# Altium PCB ArduinoUno.PcbDoc (part 2 of 2)
Units mil, origin at the board's own origin, x right, y up, seen from the top; angles counter-clockwise.
Board outline 2698.21 x 2098.43 mil, 2 copper layers (Top Layer, Bottom Layer); 60 components, 50 nets, 220 pads, 30 vias.
Unrouted connection lines stored in the file: 2.
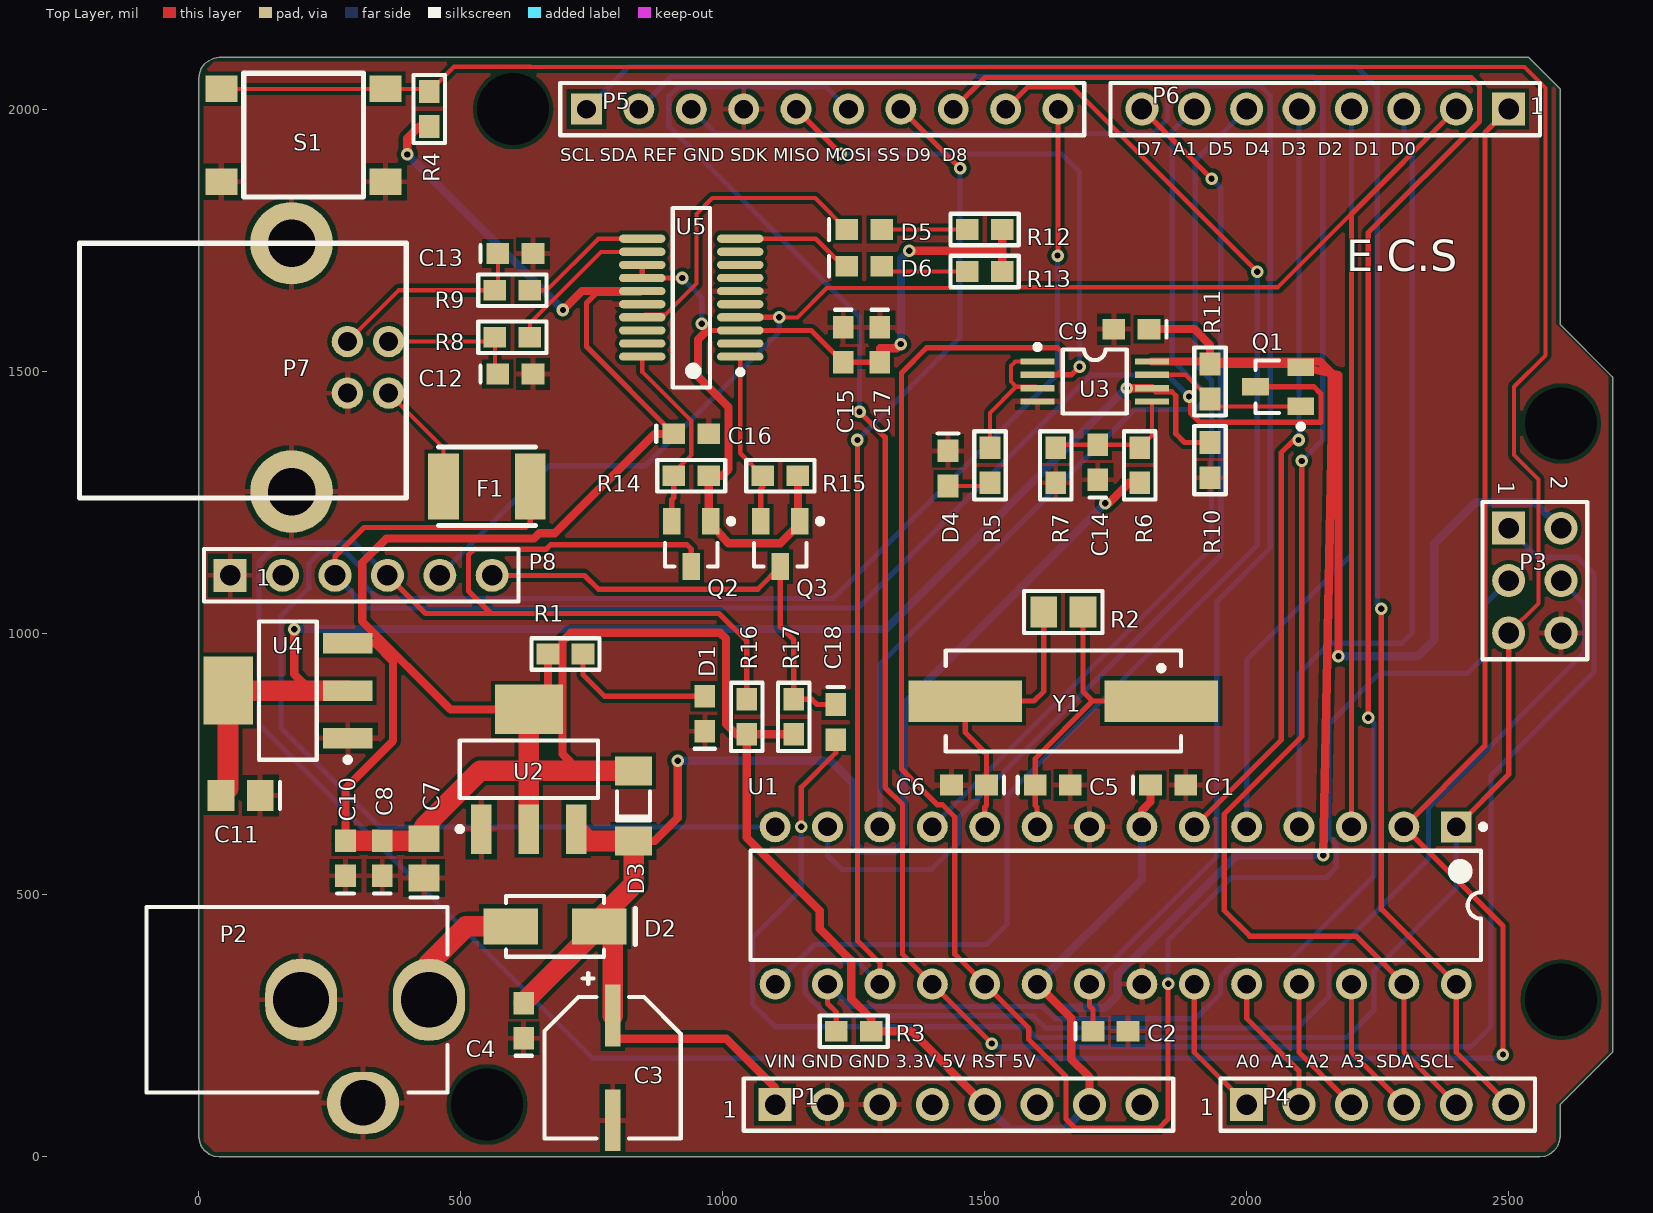
[diagram p0: Top Layer view]

## Part data (continued)
U5: "USB to Full-Handshake UART Interface Chip, UHCI/OHCI/EHCI Compatible, USB 2.0 Compatible, -40 to +85 degC, 20-Pin SSOP, Pb-Free, Tape and Reel", Case/Package=SSOP, Manufacturer=FTDI, Max Operating Temperature=85°C, Max Supply Voltage=5.5V, Min Operating Temperature=-40°C, Min Supply Voltage=2.97V, Operating Supply Current=8mA, Operating Supply Voltage=5V, Package Quantity=2000, Supplier Part Number 1=768-1129-6-ND, Code_JEDEC=MO-137-AD, ComponentLink1Description="Manufacturer URL", ComponentLink1URL=http://www.ftdichip.com/, ComponentLink2Description=Datasheet, ComponentLink2URL=http://www.ftdichip.com/Support/Documents/DataSheets/ICs/DS_FT231X.pdf, ComponentLink3Description="FT231X Product Page", ComponentLink3URL=www.ftdichip.com/Products/ICs/FT231X.html, ComponentLink4Description=http://uk.rs-online.com/webdocs/1102/0900766b811020d3.pdf, ComponentLink4URL=http://uk.rs-online.com/webdocs/1102/0900766b811020d3.pdf, ComponentLink5Description=https://media.digikey.com/pdf/Data%20Sheets/FTDI%20Chip%20PDFs/X-Chip_Series_Errata.pdf, ComponentLink5URL=https://media.digikey.com/pdf/Data%20Sheets/FTDI%20Chip%20PDFs/X-Chip_Series_Errata.pdf, ComponentLink6Description=http://www.alliedelec.com/images/products/datasheets/bm/FTDI/70403932.pdf, ComponentLink6URL=http://www.alliedelec.com/images/products/datasheets/bm/FTDI/70403932.pdf, Data Rate=12Mbps, DatasheetVersion="ver 1.2, Feb-2013", Height=0.059inch, Interface=UART,USB, Length=8.74mm, Manufacturer Part Number=FT231XS-R, Mount="Surface Mount", Number of Channels=1, Number of Pins=20, PackageDescription="20-Pin Small Outline Package, 8.6 x 3.9 mm Body, 0.635 mm Pitch", PackageReference=SSOP-20, PackageVersion=Feb-13, Packaging="Tape and Reel", PartNumber=FT231XS-R, Pricing 1="1=2.12, 25=2.05, 100=1.98, 250=1.78, 500=1.60002 (USD)", Radiation Hardening=No, Stock 1=8392, Supplier 1=Digi-Key, Weight=0.016oz, Width=0.157inch
Y1: library part XTAL, "Crystal Oscillator", ESR (Equivalent Series Resistance)=50R, Frequency Stability=50ppm, Frequency Tolerance=30ppm, Load Capacitance=20pF, Manufacturer Part Number=ECS-160-20-3X-TR, Max Operating Temperature=70°C, Min Operating Temperature=-10°C, Package Quantity=1, Supplier Part Number 1=XC1776DKR-ND, Frequency=16MHz, Height=0.091inch, Lead Free="Lead Free", Length=0.276inch, Mount="Surface Mount", Packaging="Tape and Reel", Pricing 1="1=0.38, 10=0.316, 50=0.2846, 100=0.253, 500=0.24036, 1000=0.2024 (USD)", Stock 1=30831, Supplier 1=Digi-Key, Termination=SMD/SMT, Tolerance=30ppm, Width=0.161inch

## Free pads (board coordinates)
  round 129.92 hole 137.79: 3(550,100) 4(2600,300) 5(2600,1400) 6(600,2000)

## Via types
v1: diameter 24, hole 12, Top Layer to Bottom Layer, 30 vias

## Nets (pads, with @x,y where several pads share a name; then routed paths per layer and width w, separated by ;. In a path a pad name is that pad's centre, name@x,y a point inside that pad or via, vN(x,y) a via of type N, cw(c..) or ccw(c..) an arc to the next point about the centre after c; other vN are vias at no path point)
+3.3VD: P1.4
+3V3D: C11.2 R10.1 U3.6 U4.2 | length 2658.4
  Top Layer w10: U3.6 1826.06,1460.39 1857.07,1460.39 1864.61,1452.85 1864.61,1380.45 1881.59,1363.46 R10.1
  Top Layer w15.75: v1(182.04,1007.42) 182.04,922 214.04,890 U4.2@284.17,890 ; v1(1771.04,1467.2) U3.6
  Top Layer w39.37: C11.2 55.83,703.23 55.83,890 U4.2@284.17,890
  Bottom Layer w15.75: v1(182.04,1007.42) 1311.25,1007.42 v1(1771.04,1467.2)
+3V3E: C15.2 C17.2 Q2.1 Q3.1 R12.2 R13.2 R14.1 R15.2 U5.3 U5.13 U5.14 | length 1824.2
  Top Layer w10: U5.13 U5.14 v1(922.5,1677.5) ; v1(960,1590) 972.5,1577.5 U5.3 1169.03,1577.5 C15.2 C17.2
  Top Layer w15.75: 972.5,1577.5 970.12,1577.5 953.04,1560.42 953.04,1489.42 1011.04,1431.42 1011.04,1312.42 998.62,1300 R14.1 Q2.1@973.46,1213.31 ; Q2.1 Q2.1@973.46,1213.31 ; R15.2 Q3.1@1143.46,1213.31 ; Q3.1 Q3.1@1143.46,1213.31 ; C17.2 1300,1543.42 1332.04,1543.42 v1(1340.04,1551.42) ; v1(1356.04,1729.42) 1524.46,1729.42 1533.46,1720.42 ; R13.2 1533.46,1720.42 ; R12.2 1533.46,1720.42 ; Q2.1@973.46,1213.31 975.19,1211.35 1010.46,1171.42 1110.04,1171.42 1143.46,1204.84 Q3.1@1143.46,1213.31
  Bottom Layer w10: v1(922.5,1677.5) 960,1640 v1(960,1590)
  Bottom Layer w15.75: v1(1340.04,1551.42) 1340.04,1713.42 v1(1356.04,1729.42)
+5VD: C1.1 C7.2 C8.2 C9.1 C10.2 C16.1 D3.1 P1.5 P1.7 P3.2 Q1.2 R1.1 R3.1 R4.1 R11.2 R16.1 R17.2 U1.7 U1.20 U2.2 U3.8 U4.3 U5.15 | length 10273.8
  Top Layer w10: U5.15 842.24,1648.25 758.25,1648.25 740,1630 740,1546.53 C16.1
  Top Layer w15.75: C10.2 280,703.38 370.79,794.16 370.79,945.67 335.91,980.55 U4.3 ; v1(398.04,1913.42) 398.04,1944.42 420.16,1966.53 R4.1 ; R1.1 666.53,890.71 630,854.17 480.28,854.17 312.04,1022.42 312.04,1134.42 358.02,1180.39 640.02,1180.39 650.04,1190.42 680.04,1190.42 869.62,1380 C16.1 ; v1(695.04,1616.42) 731.12,1652.5 U5.15 ; D3.1 726.04,736.93 694.04,768.93 694.04,984.42 710.04,1000.42 995.04,1000.42 1006.04,989.42 1006.04,826.54 1026.04,806.54 R16.1 ; R17.2 R16.1 ; P1.5 1360,240 R3.1 1283.46,264.42 1245.28,302.6 1245.28,375.42 1185.04,435.65 1185.04,470.42 1045.74,609.72 R16.1 ; U1.20 1665.04,264.96 1665.04,187.38 1700,152.42 P1.7 ; U1.7 1800,661.42 1816.53,677.95 C1.1 ; C9.1 1900,1580 1930,1550 R11.2 ; U3.8 R11.2@1925.08,1518.39 ; v1(2146.04,575.79) 2162.52,1382.24 2162.52,1495.02 ; v1(2175.04,955.42) 2175.04,1492.4 2162.52,1495.02 ; R11.2@1925.08,1518.39 2139.5,1518.39 2162.52,1495.36 2162.52,1495.02 ; R11.2@1925.08,1518.39 R11.2 ; R11.2 2097.24,1513.46 Q1.2 2162.52,1495.02
  Top Layer w39.37: C10.2 C8.2 426.06,603.46 C7.2 430,630 536.93,736.93 630,736.93 ; U2.2@630,625.83 630,730 636.93,736.93 ; U2.2@630,854.17 630,736.93 ; D3.1 636.93,736.93 ; 630,736.93 636.93,736.93
  Bottom Layer w15.75: v1(398.04,1913.42) v1(695.04,1616.42) ; P1.5 1547.58,52.42 1652.42,52.42 P1.7 ; U1.7 1800,530 U1.20 1645.28,284.72 1729.28,284.72 1754.04,309.49 1754.04,349.42 1980.41,575.79 v1(2146.04,575.79) ; v1(2175.04,955.42) 2326.04,955.42 2358.04,987.42 2358.04,1170.42 2437.04,1249.42 2550.58,1249.42 P3.2
+VIN: C3.1 C4.2 D2.2 D3.2 P1.1 R6.1 U2.3 | length 2796.6
  Top Layer w15.75: C3.1 790,225.42 1007.04,225.42 1100,132.46 P1.1 ; D3.2 870.04,603.07 914.04,647.07 v1(914.04,756.42) ; v1(1730.04,1247.42) 1735.91,1247.42 1775.04,1286.54 R6.1
  Top Layer w39.37: C4.2 620,295.35 D2.2 ; U2.3 743.31,603.07 D3.2 830,520 764.65,454.65 D2.2 ; C3.1 790,414.65 D2.2
  Bottom Layer w15.75: v1(914.04,756.42) 1206.04,756.42 1250.04,712.42 1250.04,600.42 1266.04,584.42 1330.04,584.42 1346.04,600.42 1346.04,863.42 v1(1730.04,1247.42)
A0: P4.1 U1.23 | length 271.4
  Top Layer w10: U1.23 1900,200 P4.1
A1: P4.2 U1.24 | length 271.4
  Top Layer w10: U1.24 2000,264.42 2100,164.42 P4.2
A2: P4.3 U1.25 | length 271.4
  Top Layer w10: U1.25 2100,200 P4.3
A3: P4.4 U1.26 | length 271.4
  Top Layer w10: U1.26 2200,200 P4.4
A4_SDA: P4.5 P5.2 U1.27 | length 3662.6
  Top Layer w10: v1(2105.04,1328.42) 2105.04,802.42 1957.04,654.42 1957.04,470.42 2006.04,421.42 2208.58,421.42 U1.27 2300,200 P4.5
  Bottom Layer w10: P5.2 902.24,2062.24 2127.21,2062.24 2145.04,2044.42 2145.04,1368.42 v1(2105.04,1328.42)
A5_SCL: P4.6 P5.1 U1.28 | length 3603.6
  Top Layer w10: v1(2257.04,1046.42) 2257.04,472.96 U1.28 2400,200 P4.6
  Bottom Layer w10: P5.1 820.12,2080.12 2210.34,2080.12 2249.04,2041.42 2249.04,1054.42 v1(2257.04,1046.42)
AREF: C2.1 P5.3 U1.21 | length 3130.2
  Top Layer w10: U1.21 1700,287.95 1706.53,281.42 C2.1
  Bottom Layer w10: P5.3 986.58,1953.42 1822.04,1953.42 1849.04,1980.42 1849.04,2030.42 1862.99,2044.37 2026.09,2044.37 2045.04,2025.42 2045.04,1162.35 1943.04,1060.35 1943.04,573.04 U1.21
D0_RX: P6.1 P8.4 Q2.3 R16.2 U1.2 | length 6650.9
  Top Layer w10: P8.4 432.58,1037.42 558.04,1037.42 ; Q2.3 940,1160.42 932,1168.42 671.29,1168.42 662.52,1159.64 525.27,1159.64 515.04,1149.42 515.04,1080.42 558.04,1037.42 ; R16.2 1045.74,984.42 992.74,1037.42 558.04,1037.42 ; v1(2489.04,195.42) 2489.04,440.96 U1.2 2455.04,785.04 2455.04,1955.04 P6.1
  Bottom Layer w10: P8.4 297.76,1172.24 151.87,1172.24 115.04,1135.42 115.04,825.42 752.04,188.42 2482.04,188.42 v1(2489.04,195.42)
D1_TX: P6.2 P8.5 U1.3 U5.4 | length 3926.6
  Top Layer w7.87: U5.4 1142.5,1602.5 1198.5,1658.5 1560.01,1658.5 1561.51,1660 2060,1660 P6.2
  Top Layer w10: U5.4 1107.96,1602.5 v1(1108.04,1602.42) ; U1.3 2200,1800 P6.2
  Bottom Layer w10: P8.5 669.42,1319.42 852.49,1319.42 1108.04,1574.97 v1(1108.04,1602.42)
D2: P6.3 U1.4 | length 1547
  Bottom Layer w10: U1.4 2100,922.38 2158.04,980.42 2296.04,980.42 2316.04,1000.42 2316.04,1930.42 2300,1946.46 P6.3
D3: P6.4 U1.5 | length 1452.8
  Bottom Layer w10: U1.5 2000,949.38 2200,1149.38 P6.4
D4: P6.5 U1.6 | length 1458.1
  Top Layer w10: U1.6 2066.04,796.04 2066.04,1344.42 2090.04,1368.42 v1(2099.04,1368.42)
  Bottom Layer w10: v1(2099.04,1368.42) 2100,1369.38 P6.5
D5: P6.6 U1.11 | length 1644
  Bottom Layer w10: U1.11 1932.79,1162.79 1932.79,1481.67 1902.04,1512.42 1902.04,1902.04 P6.6
D6: P6.7 U1.12 | length 1733.6
  Bottom Layer w10: U1.12 1300,940.5 1786.04,1426.54 1902.04,1426.54 1914.91,1439.42 1914.91,1463.98 1858.04,1520.85 1858.04,1958.04 P6.7
D7: P6.8 U1.13 | length 2006.7
  Top Layer w10: P6.8 v1(1933.04,1866.96)
  Bottom Layer w10: U1.13 1200,575.46 1227.04,548.42 1398.04,548.42 1450.04,600.42 1450.04,648.42 1950.66,1149.04 1950.66,1849.34 v1(1933.04,1866.96)
D8: P5.10 U1.14 | length 3531
  Top Layer w10: v1(1639.04,1720.42) 1640,1721.38 P5.10
  Bottom Layer w10: U1.14 346.04,630 157.04,819 157.04,1032.42 210.04,1085.42 210.04,1132.42 231.99,1154.37 280.09,1154.37 315.63,1118.83 315.63,1091.62 341.62,1065.63 1210.25,1065.63 1639.04,1494.42 v1(1639.04,1720.42)
D9: P5.9 U1.15 | length 2576.8
  Top Layer w10: P5.9 1582.42,2042.42 1667.04,2042.42 v1(2020.04,1689.42)
  Bottom Layer w10: U1.15 1175.42,405.42 1504.04,405.42 1543.04,444.42 1543.04,690.42 2020.04,1167.42 v1(2020.04,1689.42)
D10_SS: P5.8 R3.2 U1.16 | length 3935.9
  Top Layer w10: U1.16 1200,292.95 1216.53,276.42 R3.2 ; P5.8 1500.42,2060.42 2428.37,2060.42 2444.37,2044.42 2444.37,1976.42 2232.04,1764.09 v1(2232.04,838.42)
  Bottom Layer w10: U1.16 1242.58,287.42 1610.54,287.42 1633.98,263.98 1902.6,263.98 1950.04,311.42 1950.04,344.42 1982.04,376.42 2083.04,376.42 2243.04,536.42 2243.04,827.42 v1(2232.04,838.42)
D11_MOSI: P3.4 P5.7 U1.17 | length 4093.2
  Top Layer w10: v1(1257.04,1368.42) 1257.04,412.63 1300,369.67 U1.17 ; P5.7 v1(1453.04,1886.96)
  Bottom Layer w10: v1(1257.04,1368.42) 1453.04,1564.42 v1(1453.04,1886.96) ; U1.17 1257.58,372.42 1174.04,372.42 1157.04,355.42 1157.04,312.42 1200.04,269.42 1592.79,269.42 1616.1,246.1 2096.73,246.1 2157.04,306.42 2157.04,378.42 2347.04,568.42 2347.04,665.42 2645.04,963.42 2645.04,1054.96 P3.4
D12_MISO: P3.1 P5.6 U1.18 | length 4547
  Top Layer w10: v1(1261.04,1422.42) 1310.04,1373.42 1310.04,705.42 1343.04,672.42 1343.04,386.96 U1.18 v1(1513.58,216.42)
  Bottom Layer w10: P5.6 1197.6,2042.4 915.03,2042.4 897.04,2024.42 897.04,1967.42 1261.04,1603.42 v1(1261.04,1422.42) ; v1(1513.58,216.42) 1519.65,210.35 2427.98,210.35 2466.04,248.42 2466.04,728.42 2663.04,925.42 2663.04,1112.42 2631.04,1144.42 2555.58,1144.42 P3.1
D13_SCK: P3.3 P5.5 U1.19 U3.2 | length 4708.3
  Top Layer w10: P5.5 v1(1225.58,1914.42) ; U3.2 1638.04,1492.79 ; v1(1681.04,1508.42) 1665.42,1492.79 1638.04,1492.79 ; v1(1850.04,330.42) 1850.04,72.42 1833.04,55.42 1672.04,55.42 1655.04,72.42 1655.04,153.42 1584.04,224.42 1584.04,245.96 U1.19 1443.04,386.96 1443.04,648.42 1419.04,672.42 1409.04,672.42 1341.04,740.42 1341.04,1496.42 1389.04,1544.42 1639.04,1544.42 1647.04,1536.42 1647.04,1501.79 1638.04,1492.79
  Bottom Layer w10: v1(1225.58,1914.42) 1647.04,1914.42 1681.04,1880.42 v1(1681.04,1508.42) ; v1(1850.04,330.42) 1850.04,413.42 1970.04,533.42 2152.04,533.42 2171.04,552.42 2171.04,596.42 2157.04,610.42 2157.04,826.42 2254.04,923.42 2422.04,923.42 2455.04,956.42 2455.04,1055.04 P3.3
DTR: C18.1 P8.6 Q3.3 R17.1 | length 927
  Top Layer w10: P8.6 736.46,1110 763.04,1083.42 1066.72,1083.42 Q3.3 1110,1012.16 1135.74,986.42 R17.1 1170.04,873.47 1180.04,863.47 C18.1
GND: C1.2 C2.2 C3.2 C4.1 C5.2 C6.2 C7.1 C8.1 C9.2 C10.1 C11.1 C12.2 C13.2 C14.1 C15.1 C16.2 C17.1 D1.2 D4.2 P1.2 P1.3 P2.2 P2.3 P3.6 P5.4 P7.4 P7.5 P7.6 P8.1 R7.2 R10.2 S1.1 U1.8 U1.22 U2.1 U3.4 U4.1 U5.6 U5.16
NetC5_1: C5.1 R2.2 U1.9 Y1.1 | length 595.5
  Top Layer w10: U1.9 1600,667.42 1596.53,670.88 C5.1 1596.53,760.72 1705.82,870 ; R2.2 1687.4,888.42 1705.82,870 ; Y1.1 1705.82,870
NetC6_1: C6.1 R2.1 U1.10 Y1.2 | length 567
  Top Layer w10: U1.10 1500,667.42 1503.46,670.88 C6.1 1503.46,769.42 1462.99,809.89 Y1.2 1594.18,870 1612.6,888.42 R2.1
NetC12_1: C12.1 P7.2 R8.2 | length 278.3
  Top Layer w7.87: P7.2 557.01,1556.22 R8.2 565.04,1500.13 C12.1
NetC13_1: C13.1 P7.3 R9.2 | length 394.3
  Top Layer w7.87: P7.3 381.79,1654.26 R9.2 570.92,1660.13 C13.1
NetC14_2: C14.2 R6.2 R7.1 U3.5 | length 262.7
  Top Layer w7.87: R7.1 1641.61,1359.34 C14.2 1789.87,1359.34 R6.2 1819.25,1376.98 U3.5
NetD1_1: D1.1 R1.2 | length 288.9
  Top Layer w10: R1.2 733.46,920.42 774.5,879.38 D1.1
NetD2_1: D2.1 P2.1 | length 254.6
  Top Layer w39.37: P2.1 439.37,369.37 510,440 D2.1
NetD4_1: D4.1 R5.2 | length 82.4
  Top Layer w7.87: D4.1 1504.09,1280.64 R5.2
NetD5_1: D5.1 R12.1 | length 163.1
  Top Layer w7.87: D5.1 R12.1
NetD5_2: D5.2 U5.17 | length 587.2
  Top Layer w7.87: U5.17 851.81,1607.82 891.07,1607.82 950,1666.75 950,1800 980,1830 1176.53,1830 D5.2
NetD6_1: D6.1 R13.1 | length 167.2
  Top Layer w7.87: D6.1 1313.46,1690 R13.1
NetD6_2: D6.2 U5.10 | length 224.8
  Top Layer w7.87: U5.10 1177.5,1752.5 1230,1700 D6.2
NetF1_1: F1.1 P7.1 | length 221.2
  Top Layer w7.87: P7.1 467.32,1352.97 F1.1
NetQ1_1: Q1.1 R11.1 U3.7 | length 309
  Top Layer w7.87: U3.7 1883.74,1492.79 R11.1 1943.94,1432.6 Q1.1
NetQ2_2: Q2.2 R14.2 U5.20 | length 368.4
  Top Layer w7.87: U5.20 846.5,1498.08 940,1404.58 940,1340 906.53,1306.54 R14.2
  Top Layer w10: Q2.2 902.6,1254.42 906.53,1258.35 R14.2
NetQ3_2: Q3.2 R15.1 U5.1 | length 333.6
  Top Layer w7.87: U5.1 1033.5,1343.03 R15.1
  Top Layer w10: Q3.2 1072.6,1275.16 1076.53,1279.1 R15.1
NetR5_1: R5.1 U3.1 U3.3 | length 277.5
  Top Layer w7.87: R5.1 1510,1420 1560,1470 ; U3.3 1597.95,1470 1560,1470 ; U3.1 1558.39,1518.39 1550,1510 1550,1480 1560,1470
NetR8_1: R8.1 U5.12 | length 298.4
  Top Layer w7.87: R8.1 631.97,1591.97 767.5,1727.5 U5.12
NetR9_1: R9.1 U5.11 | length 255.2
  Top Layer w7.87: R9.1 664.26,1654.26 762.5,1752.5 U5.11
R\S\T\: C18.2 P3.5 R4.2 S1.2 U1.1 | length 6303.4
  Top Layer w7.87: S1.2@43.5,2038.58 356.5,2038.58 434.88,2038.58 R4.2 487.24,2080.71 633.43,2080.71 634.14,2080 2530,2080 2570,2040 2570,1530 2510,1470 2510,1340 2556.69,1293.31 2556.69,1056.69 P3.5
  Top Layer w10: v1(1150.04,630.42) 1150.04,705.72 1215.74,771.42 C18.2 ; U1.1 2500,730 P3.5
  Bottom Layer w10: v1(1150.04,630.42) 1150.04,511.42 1057.04,418.42 1057.04,291.42 1100.04,248.42 1578.04,248.42 1598.23,228.23 2190.85,228.23 2243.04,280.42 2243.04,355.42 2400,512.38 U1.1
RST: P1.6
USB+: F1.2 P8.3 Q1.3 | length 2835.9
  Top Layer w10: P8.3 260,1145.98 315.16,1201.14 623.9,1201.14 632.68,1209.91 F1.2 ; v1(1890.04,1451.42) 1893.04,1448.42 1893.04,1419.42 1910.04,1402.42 2141.77,1402.42 2141.77,1456.42 2128.19,1470 Q1.3
  Bottom Layer w10: P8.3 322.24,1047.76 1258.38,1047.76 1703.04,1492.42 1849.04,1492.42 v1(1890.04,1451.42)
pads on no net: P1.8 P8.2 U5.2 U5.5 U5.7 U5.8 U5.9 U5.18 U5.19

## Polygon pours and split planes (outlines as drawn)
GND on Top Layer (solid, pour order 8): 2590,30 2570,10 30,10 10,30 10,2070 30,2090 2540,2090 2553.3,2076.7 2560,2076.7 2560,2070 2590,2040 2590,1590 2690,1490 2690,200 2590,100

## Silkscreen, mask and mechanical layers (free items; w line width, h text height)
Top Overlay:
  text "D7  A1  D5  D4  D3  D2  D1  D0" at 1790,1911.58 h25
  text "SCL SDA REF GND SDK MISO MOSI SS D9  D8" at 690,1900 h25
  text "E.C.S" at 2190,1690 h60
  text "VIN GND GND 3.3V 5V RST 5V" at 1080,170 h25
  text "A0  A1  A2  A3  SDA SCL" at 1980,170 h25
Mechanical 2:
  drawing of 724 lines, arcs and shapes, not listed
Mechanical 3:
  the board outline again, w0.5
Mechanical 4:
  circle w0.25: c39.15,2098.43 r0.12
  circle w0.25: c0,199.93 r0.12
  circle w0.25: c2698.21,199.93 r0.12
  circle w0.25: c39.15,0 r0.12

## Text inside footprints (layer, text, board x,y; h text height)
P1: Top Overlay "1" at 1000,74.99 h31.5
P3: Top Overlay "2" at 2580,1300 h31.5 r270; Top Overlay "1" at 2480,1290 h31.5 r270
P4: Top Overlay "1" at 1910,80 h31.5
P6: Top Overlay "1" at 2540,1990 h31.5
P8: Top Overlay "1" at 110,1090 h31.5